# Altium PCB RiscPC_VRAM_16bit.PcbDoc (part 1 of 2)
Units mm, origin at the board's own origin, x right, y up, seen from the top; angles counter-clockwise.
Board outline 102.87 x 28 mm, 6 copper layers (Top_Power, Inner 1, Inner 2, Inner 3, Inner 4, Bottom_Ground), stack 1.211 mm thick; 29 components, 122 nets, 442 pads, 442 vias.
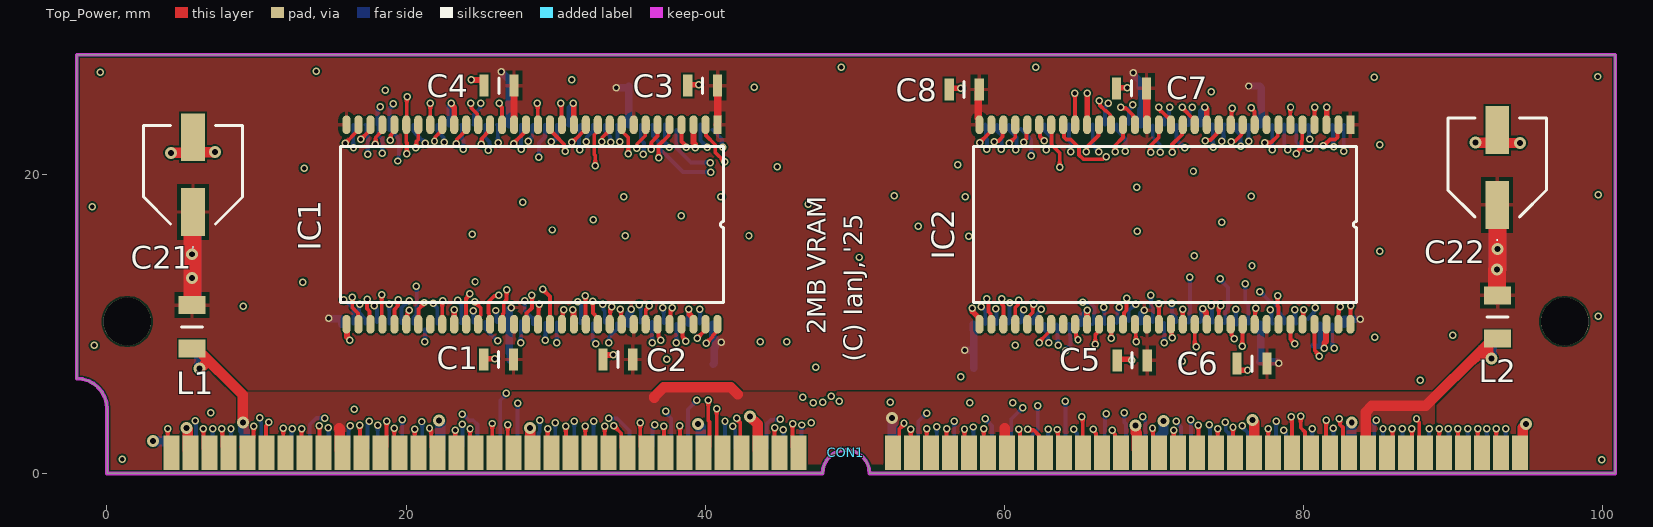
[diagram p0: Top_Power view]
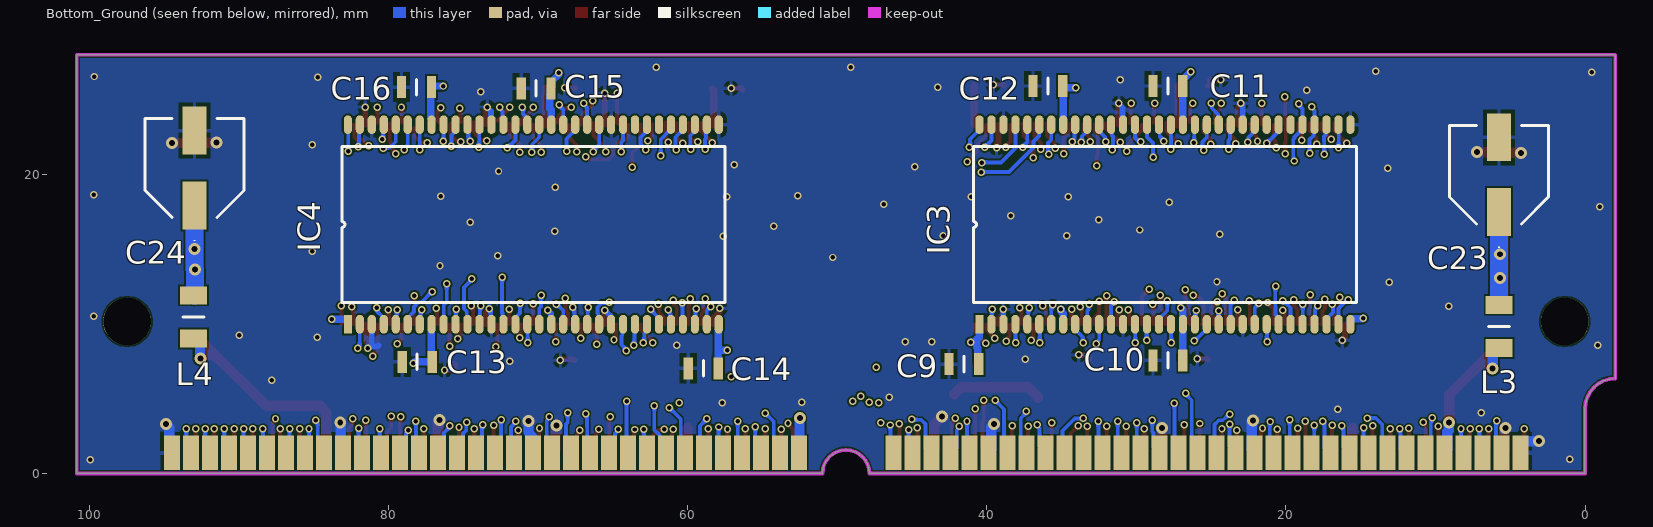
[diagram p1: Bottom_Ground view, seen from below]
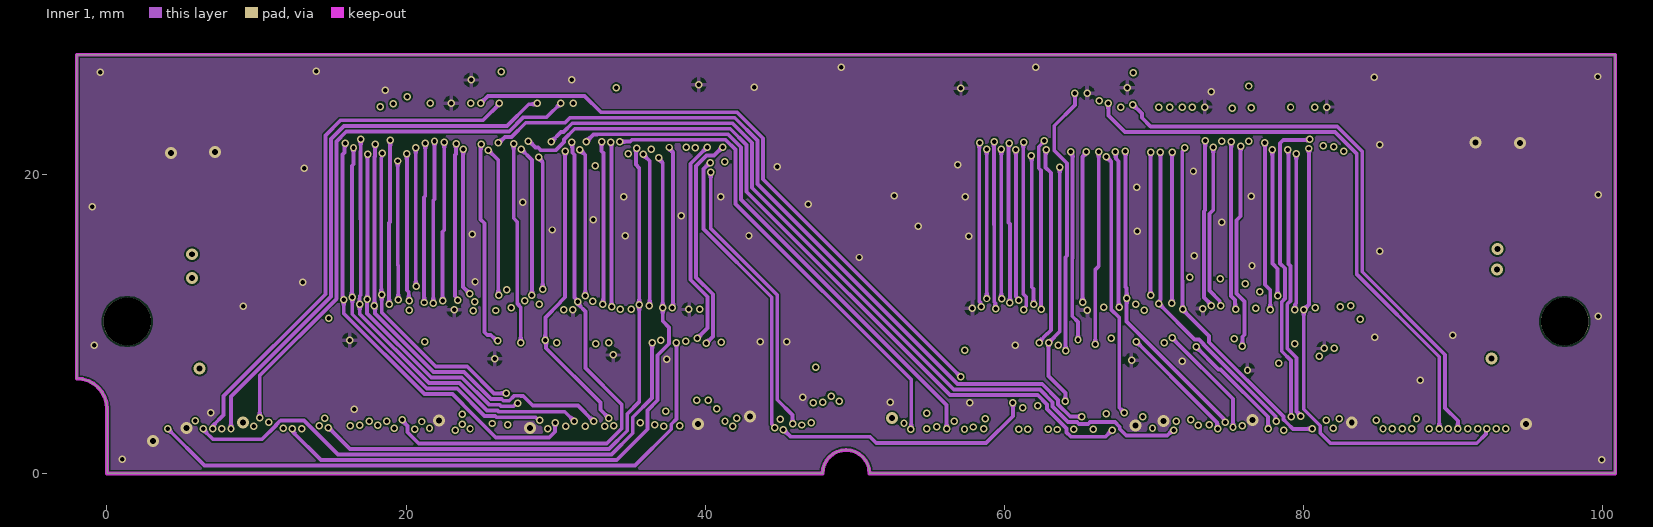
[diagram p2: Inner 1]
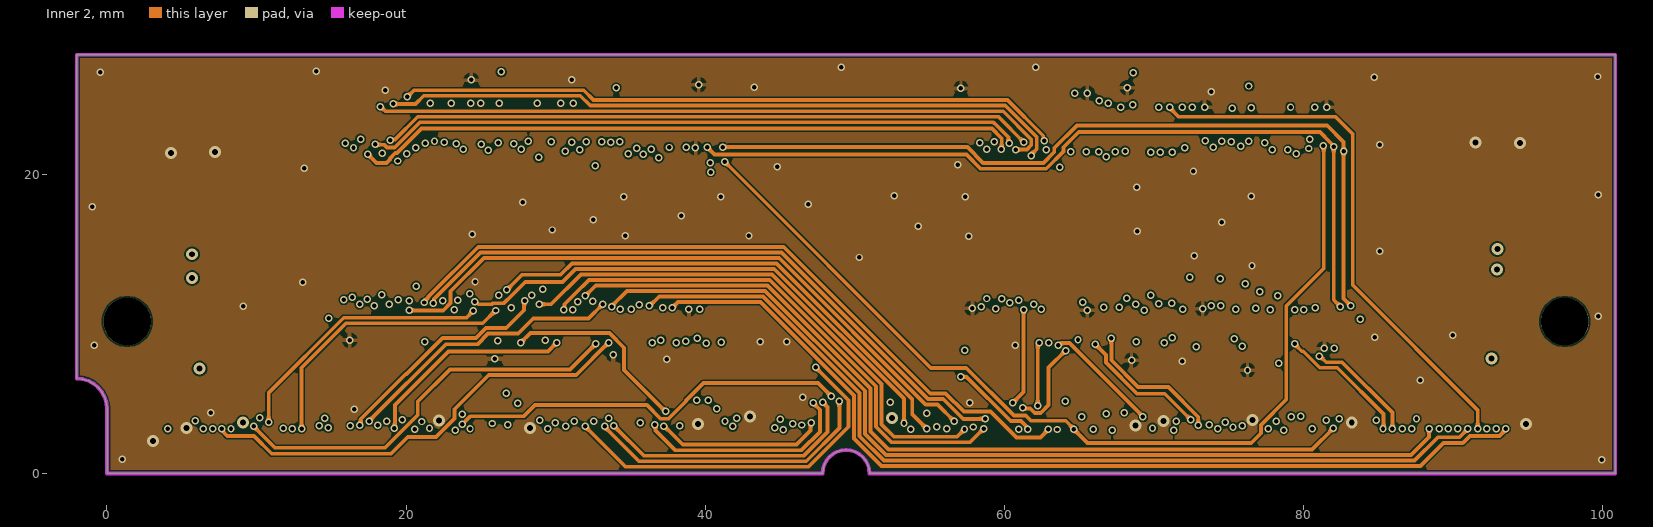
[diagram p3: Inner 2]
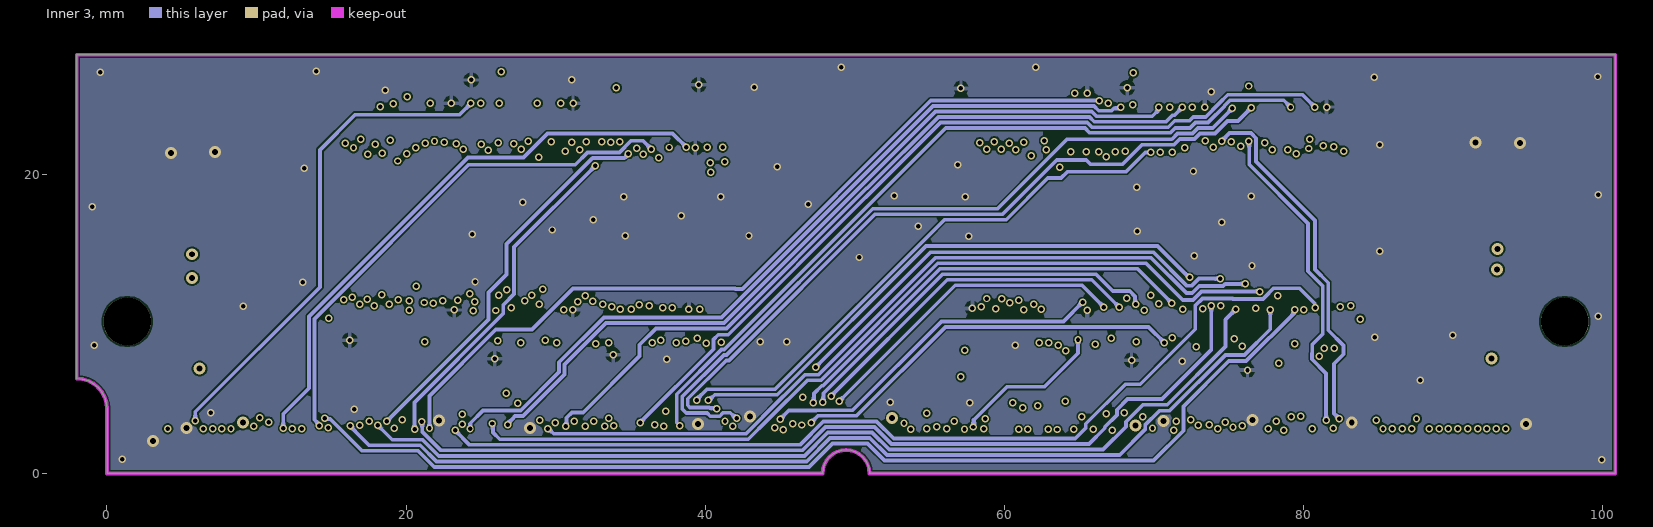
[diagram p4: Inner 3]
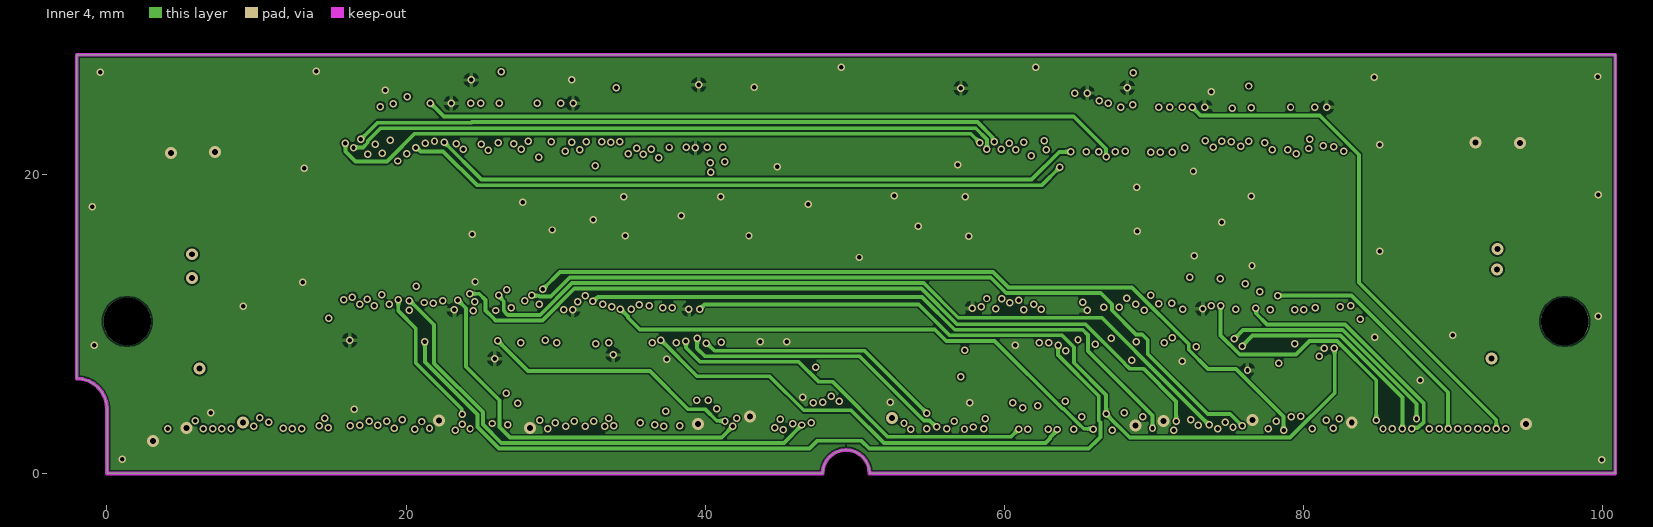
[diagram p5: Inner 4]
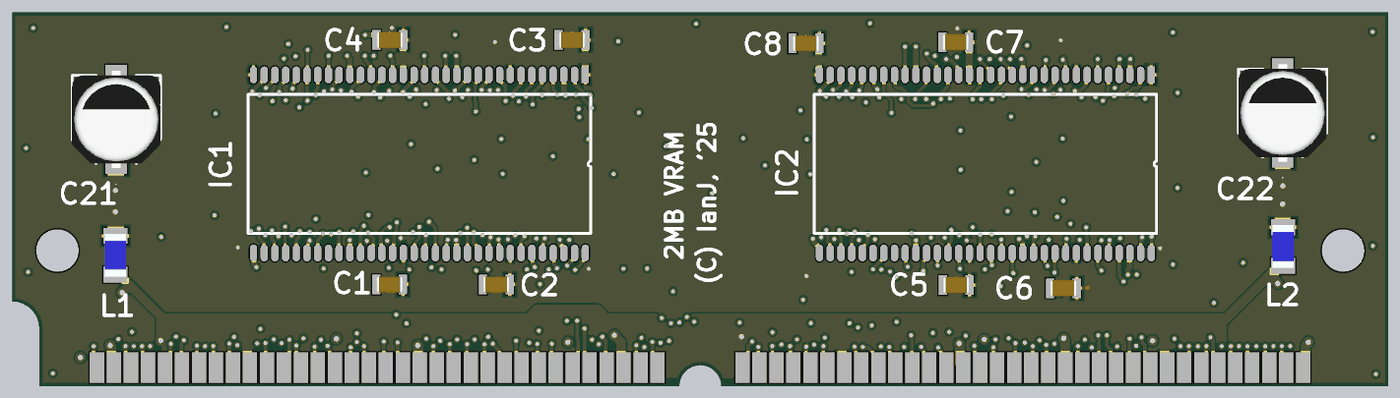
[diagram p7: 3D render of the assembled board from above, using the file's embedded part models]
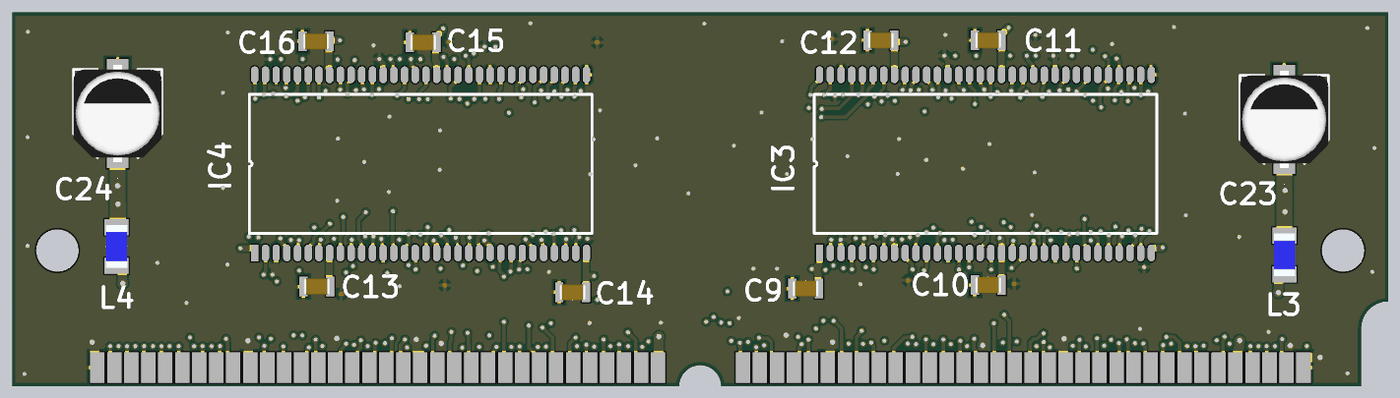
[diagram p8: 3D render of the assembled board from below, using the file's embedded part models]

## Layer stack, top to bottom
Top Solder: solder mask 0.0102, Solder Resist, Dk 3.5
Top_Power: signal copper 0.0356
Dielectric 3: prepreg 0.15, PP-006, Dk 4.1
Inner 1: signal copper 0.035
Dielectric 1: prepreg 0.15, PP-006, Dk 4.1
Inner 2: signal copper 0.035
Core: dielectric 0.4, FR-4, Dk 4.8
Inner 3: signal copper 0.035
Dielectric 2: prepreg 0.15, PP-006, Dk 4.1
Inner 4: signal copper 0.035
Dielectric 4: prepreg 0.15, PP-006, Dk 4.1
Bottom_Ground: signal copper 0.0356
Bottom Solder: solder mask 0.0102, Solder Resist, Dk 3.5

## Board outline
-2.023,28.003 -2.023,6.353 -1.627,6.314 -1.246,6.198 -0.896,6.01 -0.588,5.758 -0.335,5.45 -0.148,5.099 -0.032,4.719 0.007,4.323 0.007,0.003 47.847,0.003 47.877,0.309 47.966,0.603 48.111,0.875 48.307,1.113 48.544,1.308 48.816,1.453 49.11,1.542 49.417,1.573 49.723,1.542 50.017,1.453 50.289,1.308 50.527,1.113 50.722,0.875 50.867,0.603 50.957,0.309 50.987,0.003 100.847,0.003 100.847,28.003

## Design rules (kind name [scope] priority, off if disabled: settings)
Clearance [All] p1: gap=0.114 ignorepadtopadclearanceinfootprint=FALSE
HoleSize [All] p1: absolutevalues=TRUE maxlimit=3.81 minlimit=0.025 maxpercent=80.000 minpercent=20.000
MinimumSolderMaskSliver [All] p1: minsoldermaskwidth=0.02
PolygonConnect [All] p1: connectstyle=Relief reliefconductorwidth=0.254 reliefentries=4 polygonreliefangle="90 Angle" airgapwidth=0.254
RoutingVias [All] p1: holewidth=0.3 width=0.45 viastyle="Through Hole" minholewidth=0.3 minwidth=0.45 maxholewidth=0.711 maxwidth=1.27
SilkToSolderMaskClearance [IsPad] p1: minsilkscreentomaskgap=0.127 clearancetoexposedcopper=TRUE
SolderMaskExpansion [All] p1: expansion=0.102 istentingtop=FALSE
SupplyNets "Schematic Supply Nets_2" [InNet('VCC')] p1: voltage=0.000
SupplyNets "Schematic Supply Nets_1" [InNet('RAM_VCC')] p2: voltage=0.000
SupplyNets "Schematic Supply Nets" [InNet('GND')] p3: voltage=0.000
Width [All] p1: maxlimit=1.2 minlimit=0.254 preferedwidth=0.254
27 further rules are at their usual default settings.

## Components (designator, comment, footprint, x,y, rotation, side; value= is the part's Value field where it differs from the comment)
C1 "100nF" CAPC2012X145N 26.187,7.62 r180 top
C2 "100nF" CAPC2012X145N 34.163,7.62 r180 top
C3 "100nF" CAPC2012X145N 39.827,25.933 r180 top
C4 "100nF" CAPC2012X145N 26.213,25.933 r180 top
C5 "100nF" CAPC2012X145N 68.545,7.569 r180 top
C6 "100nF" CAPC2012X145N 76.556,7.341 r180 top
C7 "100nF" CAPC2012X145N 68.504,25.756 r180 top
C8 "100nF" CAPC2012X145N 57.312,25.679 r180 top
C9 "100nF" CAPC2012X145N 41.529,7.315 r0 bottom
C10 "100nF" CAPC2012X145N 27.889,7.569 r0 bottom
C11 "100nF" CAPC2012X145N 27.889,25.908 r0 bottom
C12 "100nF" CAPC2012X145N 35.916,25.908 r0 bottom
C13 "100nF" CAPC2012X145N 78.08,7.468 r0 bottom
C14 "100nF" CAPC2012X145N 58.953,7.036 r0 bottom
C15 "100nF" CAPC2012X145N 70.129,25.756 r0 bottom
C16 "100nF" CAPC2012X145N 78.13,25.832 r0 bottom
C21 "EEE-HA1C470AP" EEE1AA101SP 5.756,19.98 r90 top
C22 "EEE-HA1C470AP" EEE1AA101SP 92.951,20.462 r90 top
C23 "EEE-HA1C470AP" EEE1AA101SP 5.756,19.98 r90 bottom
C24 "EEE-HA1C470AP" EEE1AA101SP 92.964,20.422 r90 bottom
CON1 "RiscPC_VRAM_Edge" RiscPC_VRAM_Edge 3.782,0.25 r0 top locked
IC1 "KM4216C258G-50" KM4216C258G-50_SSOP64 40.818,23.317 r270 top locked
IC2 "KM4216C258G-50" KM4216C258G-50_SSOP64 83.132,23.317 r270 top locked
IC3 "KM4216C258G-50" KM4216C258G-50_SSOP64 40.487,9.982 r90 bottom locked
IC4 "KM4216C258G-50" KM4216C258G-50_SSOP64 82.715,9.982 r90 bottom locked
L1 "74279215" INDC3216X130N 5.69,9.804 r90 top
L2 "74279215" INDC3216X130N 92.976,10.462 r90 top
L3 "74279215" INDC3216X130N 5.74,9.83 r90 bottom
L4 "74279215" INDC3216X130N 93.04,10.465 r90 bottom

## Footprints (in the part's own frame and the unit in brackets; to place one, negate y for a bottom-side part, rotate by r counter-clockwise, add the part's x,y. Pads: shape width x height; smd on the part's side, far side on the other; paste and mask are expansions set on the pad)
CAPC2012X145N [mm]
  rect 0.62x1.47 smd: 1(-1,0) 2(1,0)
  silkscreen extent 0,-0.53 0,0.53, body extent -1,-0.63 1,0.63, height 1.45
EEE1AA101SP [mm]
  rect 3.2x1.6 smd: 1(-2.5,0) 2(2.5,0)
  silkscreen extent -4.88,-3.3 3.3,3.3, body extent 0,0 0,0
INDC3216X130N [mm]
  rect 1.2x1.8 smd: 1(-1.45,0) 2(1.45,0)
  silkscreen extent 0,-0.7 0,0.7, body extent -1.6,-0.8 1.6,0.8, height 1.3
KM4216C258G-50_SSOP64 [mm]
  rect 1.25x0.55 smd: 1(0,0)
  oval 1.25x0.55 smd: 2(0,-0.8) 3(0,-1.6) 4(0,-2.4) 5(0,-3.2) 6(0,-4) 7(0,-4.8) 8(0,-5.6) 9(0,-6.4) 10(0,-7.2) 11(0,-8) 12(0,-8.8) 13(0,-9.6) 14(0,-10.4) 15(0,-11.2) 16(0,-12) 17(0,-12.8) 18(0,-13.6) 19(0,-14.4) 20(0,-15.2) 21(0,-16) 22(0,-16.8) 23(0,-17.6) 24(0,-18.4) 25(0,-19.2) 26(0,-20) 27(0,-20.8) 28(0,-21.6) 29(0,-22.4) 30(0,-23.2) 31(0,-24) 32(0,-24.8) 33(13.34,-24.8) 34(13.34,-24) 35(13.34,-23.2) 36(13.34,-22.4) 37(13.34,-21.6) 38(13.34,-20.8) 39(13.34,-20) 40(13.34,-19.2) 41(13.34,-18.4) 42(13.34,-17.6) 43(13.34,-16.8) 44(13.34,-16) 45(13.34,-15.2) 46(13.34,-14.4) 47(13.34,-13.6) 48(13.34,-12.8) 49(13.34,-12) 50(13.34,-11.2) 51(13.34,-10.4) 52(13.34,-9.6) 53(13.34,-8.8) 54(13.34,-8) 55(13.34,-7.2) 56(13.34,-6.4) 57(13.34,-5.6) 58(13.34,-4.8) 59(13.34,-4) 60(13.34,-3.2) 61(13.34,-2.4) 62(13.34,-1.6) 63(13.34,-0.8) 64(13.34,0)
  silkscreen extent 1.46,-25.2 11.88,0.4, body extent 0.33,-25.4 13.18,0.53, height 2.4
RiscPC_VRAM_Edge [mm]
  rect 1.07x2.29 smd: A1(0.533,1.143) A2(1.803,1.143) A3(3.073,1.143) A4(4.343,1.143) A5(5.613,1.143) A6(6.883,1.143) A7(8.153,1.143) A8(9.423,1.143) A9(10.693,1.143) A10(11.963,1.143) A11(13.233,1.143) A12(14.503,1.143) A13(15.773,1.143) A14(17.043,1.143) A15(18.313,1.143) A16(19.583,1.143) A17(20.853,1.143) A18(22.123,1.143) A19(23.393,1.143) A20(24.663,1.143) A21(25.933,1.143) A22(27.203,1.143) A23(28.473,1.143) A24(29.743,1.143) A25(31.013,1.143) A26(32.283,1.143) A27(33.553,1.143) A28(34.823,1.143) A29(36.093,1.143) A30(37.363,1.143) A31(38.633,1.143) A32(39.903,1.143) A33(41.173,1.143) A34(42.443,1.143) A35(48.785,1.143) A36(50.055,1.143) A37(51.325,1.143) A38(52.595,1.143) A39(53.865,1.143) A40(55.135,1.143) A41(56.405,1.143) A42(57.675,1.143) A43(58.945,1.143) A44(60.215,1.143) A45(61.485,1.143) A46(62.755,1.143) A47(64.025,1.143) A48(65.295,1.143) A49(66.565,1.143) A50(67.835,1.143) A51(69.105,1.143) A52(70.375,1.143) A53(71.645,1.143) A54(72.915,1.143) A55(74.185,1.143) A56(75.455,1.143) A57(76.725,1.143) A58(77.995,1.143) A59(79.265,1.143) A60(80.535,1.143) A61(81.805,1.143) A62(83.075,1.143) A63(84.345,1.143) A64(85.615,1.143) A65(86.885,1.143) A66(88.155,1.143) A67(89.425,1.143) A68(90.695,1.143)
  rect 1.07x2.29 smd far side: B1(0.533,1.143) B2(1.803,1.143) B3(3.073,1.143) B4(4.343,1.143) B5(5.613,1.143) B6(6.883,1.143) B7(8.153,1.143) B8(9.423,1.143) B9(10.693,1.143) B10(11.963,1.143) B11(13.233,1.143) B12(14.503,1.143) B13(15.773,1.143) B14(17.043,1.143) B15(18.313,1.143) B16(19.583,1.143) B17(20.853,1.143) B18(22.123,1.143) B19(23.393,1.143) B20(24.663,1.143) B21(25.933,1.143) B22(27.203,1.143) B23(28.473,1.143) B24(29.743,1.143) B25(31.013,1.143) B26(32.283,1.143) B27(33.553,1.143) B28(34.823,1.143) B29(36.093,1.143) B30(37.363,1.143) B31(38.633,1.143) B32(39.903,1.143) B33(41.173,1.143) B34(42.443,1.143) B35(48.785,1.143) B36(50.055,1.143) B37(51.325,1.143) B38(52.595,1.143) B39(53.865,1.143) B40(55.135,1.143) B41(56.405,1.143) B42(57.675,1.143) B43(58.945,1.143) B44(60.215,1.143) B45(61.485,1.143) B46(62.755,1.143) B47(64.025,1.143) B48(65.295,1.143) B49(66.565,1.143) B50(67.835,1.143) B51(69.105,1.143) B52(70.375,1.143) B53(71.645,1.143) B54(72.915,1.143) B55(74.185,1.143) B56(75.455,1.143) B57(76.725,1.143) B58(77.995,1.143) B59(79.265,1.143) B60(80.535,1.143) B61(81.805,1.143) B62(83.075,1.143) B63(84.345,1.143) B64(85.615,1.143) B65(86.885,1.143) B66(88.155,1.143) B67(89.425,1.143) B68(90.695,1.143)

## Part data
C1 C2 C3 C4 C5 C6 C7 C8 C9 C10 C11 C12 C13 C14 C15 C16: library part C2012X7R1H104K125AM, "Capacitor", Manufacturer_Name=TDK, Mouser Part Number=810-C2012X7R1H104KT5, Arrow Part Number=C2012X7R1H104K125AM, Arrow Price/Stock=https://www.arrow.com/en/products/c2012x7r1h104k125am/tdk, Datasheet Link=https://product.tdk.com/info/en/catalog/datasheets/mlcc_commercial_midvoltage_en.pdf, Height=1.45mm, Manufacturer_Part_Number=C2012X7R1H104K125AM, Mouser Price/Stock=https://www.mouser.com/Search/Refine.aspx?Keyword=810-C2012X7R1H104KT5
C21 C22 C23 C24: "Capacitor Polarised", Manufacturer_Name=Panasonic, Mouser Part Number=667-EEE-HA1C470AP, Arrow Part Number=EEE-HA1C470AP, Arrow Price/Stock=https://www.arrow.com/en/products/eeeha1c470ap/panasonic?utm_currency=USD&region=europe, Datasheet Link=http://industrial.panasonic.com/cdbs/www-data/pdf/RDE0000/ABA0000C1148.pdf, Height=7.8mm, Manufacturer_Part_Number=EEE-HA1C470AP, Mouser Price/Stock=https://www.mouser.co.uk/ProductDetail/Panasonic/EEE-HA1C470AP?qs=d1CqaRUMZD%2FL5qU1hDRerg%3D%3D
L1 L2 L3 L4: "Inductor", Manufacturer_Name="Wurth Elektronik", Mouser Part Number=710-74279215, Datasheet Link=http://componentsearchengine.com/Datasheets/1/74279215.pdf, Height=1.3mm, Manufacturer_Part_Number=74279215, Mouser Price/Stock=https://www.mouser.co.uk/ProductDetail/Wurth-Elektronik/74279215?qs=5twSNpOB8IC%252BebnV0jQtuw%3D%3D

## Free pads (board coordinates)
  round 3.18 hole 3.18 unplated: 1(1.357,10.163) 1(97.467,10.163)

## Via types
v1: diameter 0.5, hole 0.3, Top_Power to Bottom_Ground, tented both sides, 419 vias
v2: diameter 0.8, hole 0.4, Top_Power to Bottom_Ground, tented both sides, 23 vias

## Nets (pads, with @x,y where several pads share a name; then routed paths per layer and width w, separated by ;. In a path a pad name is that pad's centre, name@x,y a point inside that pad or via, vN(x,y) a via of type N, cw(c..) or ccw(c..) an arc to the next point about the centre after c; other vN are vias at no path point)
Cas0*: CON1.B40 IC1.24 IC3.24 | length 59.2
  Top_Power w0.254: v1(21.899,22.229) 21.947,22.276 21.947,22.496 22.321,22.871 22.321,23.299 IC1.24@22.393,23.371
  Inner 1 w0.254: v1(21.819,11.397) 21.819,18.263 21.899,18.343 v1(21.899,22.229)
  Inner 2 w0.254: v1(21.819,11.397) 21.866,11.444 21.866,11.673 24.976,14.783 45.098,14.783 54.89,4.991 55.918,4.991 57.256,3.653 58.725,3.653 v1(58.729,3.649)
  Bottom_Ground w0.254: v1(21.819,11.397) 21.819,11.33 22.087,11.061 22.087,10.044 IC3.24@22.098,10.033 ; v1(58.729,3.649) 58.729,3.639 59.171,3.198 59.171,1.683 CON1.B40@58.944,1.457
Cas1*: CON1.B43 IC1.39 IC3.39 | length 64.4
  Top_Power w0.254: IC1.39@20.818,9.977 20.826,9.986 20.826,10.987 21.206,11.367 v1(21.206,11.433)
  Inner 1 w0.254: v1(21.206,11.433) 21.205,18.462 21.285,18.542 v1(21.285,22.073)
  Inner 2 w0.254: v1(21.206,11.433) 21.206,11.5 21.497,11.792 21.497,11.826 24.823,15.151 45.25,15.151 55.042,5.36 56.071,5.36 57.29,4.14 59.073,4.14 60.803,2.411 62.413,2.411 62.922,2.92 v1(62.922,2.974)
  Bottom_Ground w0.254: IC3.39@20.487,23.322 20.487,22.892 20.635,22.744 20.635,22.722 v1(21.285,22.073) ; CON1.B43@62.703,1.38 62.922,1.599 v1(62.922,2.974)
Cas2*: CON1.B41 IC2.24 IC4.24 | length 31.8
  Top_Power w0.254: IC2.24@64.636,23.373 64.719,23.457 v1(64.719,25.432)
  Inner 1 w0.254: v1(64.089,8.212) 64.093,8.215 64.093,14.462 64.194,14.563 64.194,20.743 63.756,21.182 63.747,21.182 63.339,21.59 63.339,23.251 64.719,24.631 v1(64.719,25.432)
  Inner 2 w0.254: v1(61.214,4.394) 61.261,4.347 61.735,4.347 62.026,4.055 62.434,4.055 62.96,4.581 62.96,7.082 v1(64.089,8.212)
  Bottom_Ground w0.254: CON1.B41@60.163,1.482 60.461,1.78 60.461,3.642 v1(61.214,4.394) ; v1(64.089,8.212) 64.089,8.278 64.423,8.612 64.423,9.191 64.372,9.243 64.372,9.956 IC4.24@64.315,10.013
Cas3*: CON1.B42 IC2.39 IC4.39 | length 24.6
  Top_Power w0.254: v1(62.332,8.754) 62.332,8.811 63.132,9.612 IC2.39@63.132,9.977
  Inner 1 w0.254: v1(62.332,8.754) 62.332,8.814 62.859,9.342 62.876,9.342 63.11,9.576 63.11,20.113 62.755,20.469 62.755,21.607 v1(62.789,21.641)
  Inner 2 w0.254: v1(62.23,4.547) 62.23,8.586 62.332,8.688 v1(62.332,8.754)
  Bottom_Ground w0.254: CON1.B42@61.459,1.431 61.865,1.837 61.865,2.548 61.951,2.634 61.951,2.638 62.23,2.917 v1(62.23,4.547) ; IC4.39@62.687,23.335 62.687,22.926 63.142,22.471 63.142,22.036 62.789,21.683 v1(62.789,21.641)
Dsf: CON1.B39 IC1.41 IC2.41 IC3.41 IC4.41 | length 85.5
  Top_Power w0.254: IC1.41@22.418,9.977 22.418,11.53 v1(22.436,11.549) ; IC2.41@64.732,9.977 64.789,9.921 64.789,9.141 64.922,9.007 v1(64.922,8.941)
  Inner 1 w0.254: v1(22.436,11.549) 22.436,16.168 22.555,16.287 v1(22.555,22.149) ; v1(64.448,21.505) 64.448,21.439 64.563,21.324 64.563,14.411 64.533,14.381 64.533,10.515 64.922,10.126 v1(64.922,8.941)
  Inner 4 w0.254: v1(22.555,22.149) 25.044,19.66 61.824,19.66 63.669,21.505 v1(64.448,21.505)
  Inner 3 w0.254: 57.929,3.595 v1(57.929,3.11) 57.976,3.157 57.976,3.595 60.177,5.796 62.675,5.796 64.922,8.044 v1(64.922,8.941)
  Bottom_Ground w0.254: IC3.41@22.087,23.322 22.087,22.896 22.508,22.475 22.508,22.196 v1(22.555,22.149) ; CON1.B39@57.623,1.482 57.929,1.788 v1(57.929,3.11) ; IC4.41@64.315,23.333 64.315,22.263 64.442,22.136 64.442,21.512 v1(64.448,21.505)
Dt0*: CON1.B45 IC1.2 IC2.2 | length 71.5
  Top_Power w0.254: IC1.2@40.018,23.317 40.06,23.275 40.06,22.59 40.669,21.98 40.669,21.471 v1(41.3,20.84) ; v1(81.334,21.898) 81.763,22.327 82.127,22.327 82.276,22.475 82.276,23.261 IC2.2@82.332,23.317
  Inner 2 w0.254: v1(41.3,20.84) 55.077,7.063 57.453,7.063 60.642,3.873 61.433,3.873 61.776,3.531 64.101,3.531 64.652,2.98 v1(64.652,2.947) 65.556,2.043 76.505,2.043 77.157,2.694 77.157,3.25 78.85,4.944 78.85,11.203 81.352,13.705 81.352,21.881 v1(81.334,21.898)
  Bottom_Ground w0.254: v1(64.652,2.947) 64.652,2.88 64.859,2.673 64.859,2.244 CON1.B45@65.381,1.722
Dt1*: CON1.B46 IC3.2 IC4.2 | length 57.2
  Inner 4 w0.254: v1(39.624,10.971) 39.956,11.303 54.28,11.303 56.337,9.246 63.856,9.246 64.655,8.446 64.655,7.404 66.802,5.258 v1(66.802,3.988) 68.379,2.411 79.103,2.411 82.084,5.392 82.084,8.319 v1(82.042,8.361)
  Bottom_Ground w0.254: v1(39.624,10.971) 39.656,10.94 39.656,10.065 IC3.2@39.631,10.04 ; CON1.B46@66.539,1.406 66.729,1.596 66.708,1.617 66.708,3.1 66.729,3.121 66.729,3.848 66.802,3.921 v1(66.802,3.988) ; IC4.2@81.915,9.982 81.915,8.554 82.042,8.427 v1(82.042,8.361)
GND: C1.2 C2.2 C3.2 C4.2 C5.2 C6.2 C7.2 C8.2 C9.2 C10.2 C11.2 C12.2 C13.2 C14.2 C15.2 C16.2 C21.2 C22.2 C23.2 C24.2 CON1.A2 CON1.A20 CON1.A32 CON1.A48 CON1.A54 CON1.A68 CON1.B1 CON1.B15 CON1.B29 CON1.B49 CON1.B59 CON1.B68 IC1.3 IC1.13 IC1.23 IC1.33 IC1.42 IC1.52 IC1.62 IC2.3 IC2.13 IC2.23 IC2.33 IC2.42 IC2.52 IC2.62 IC3.3 IC3.13 IC3.23 IC3.33 IC3.42 IC3.52 IC3.62 IC4.3 IC4.13 IC4.23 IC4.33 IC4.42 IC4.52 IC4.62 | length 64.8
  Top_Power w0.381: IC1.33@16.018,9.977 16.05,9.945 16.05,9.128 16.231,8.948 v1(16.231,8.915) ; v1@23.012,24.71 23.012,24.677 23.217,24.473 23.217,23.318 IC1.23@23.218,23.317 ; v1(23.216,10.939) 23.217,10.938 23.217,9.978 IC1.42@23.218,9.977 ; v1(24.359,26.314) 25.093,26.314 25.093,26.053 C4.2@25.213,25.933 ; C1.2@25.187,7.62 25.238,7.671 v1(25.933,7.671) ; v1@31.166,24.74 31.166,24.707 31.218,24.656 IC1.13@31.218,23.317 ; C2.2@33.163,7.62 33.163,7.805 33.282,7.925 v1(33.858,7.925) ; C3.2@38.827,25.933 38.891,25.998 v1(39.573,25.998) ; v1(38.913,10.971) 38.936,10.949 38.936,10.655 39.218,10.373 IC1.62@39.218,9.977 ; IC1.3@39.218,23.317 39.218,22.122 39.322,22.018 39.322,21.791 v1(39.345,21.768) ; C8.2@56.312,25.679 56.384,25.752 v1(57.099,25.752) ; v1(57.844,11.047) 57.867,11.024 57.867,10.838 58.332,10.373 IC2.33@58.332,9.977 ; IC2.23@65.532,23.317 v1(65.532,25.434) ; C7.2@67.504,25.756 67.547,25.799 v1(68.217,25.799) ; C5.2@67.545,7.569 67.588,7.569 67.665,7.645 68.395,7.645 68.472,7.569 v1(68.504,7.569) ; CON1.A48@68.859,1.611 CON1.A48@69.077,1.393 ; v1(73.254,11.024) 73.254,10.991 73.5,10.745 73.5,10.01 IC2.52@73.532,9.977 ; v1@73.406,24.511 73.406,24.479 73.532,24.353 IC2.13@73.532,23.37 ; C6.2@75.556,7.341 75.556,7.033 75.675,6.913 v1(76.255,6.913) ; v1(81.382,8.361) 81.382,8.712 81.5,8.83 81.5,9.945 IC2.62@81.532,9.977 ; IC2.3@81.532,23.317 81.546,23.331 81.546,24.523 v1@81.559,24.536 ; CON1.A68@94.477,1.393 CON1.A68@94.495,1.411
  Top_Power w0.4: v1(31.157,10.95) 31.157,10.946 31.189,10.914 31.189,10.028 IC1.52@31.218,9.998 ; IC2.42@65.534,9.998 65.535,10 65.535,10.915 v1(65.538,10.918)
  Top_Power w0.5: C21.2@5.756,21.438 C21.2@5.807,21.488 ; C22.2@92.784,22.123 C22.2@92.86,22.047 ; C22.2@93.292,22.257 C22.2@93.451,22.098
  Top_Power w0.7: v2(4.293,21.438) C21.2@5.756,21.438 ; v2(5.309,3.052) 5.309,3.025 5.4,2.934 5.4,1.578 CON1.A2@5.585,1.393 ; C21.2@5.807,21.488 v2(7.214,21.488) ; v2(28.296,3.052) 28.315,3.033 28.315,1.263 CON1.A20@28.445,1.393 ; v2(42.989,3.823) 42.989,3.796 43.5,3.285 43.5,1.578 CON1.A32@43.685,1.393 ; v2(68.771,3.2) 68.79,3.181 68.79,2.747 68.859,2.677 CON1.A48@68.859,1.611 ; v2(76.581,3.581) 76.581,3.554 76.697,3.438 CON1.A54@76.697,1.393 ; v2(91.491,22.123) C22.2@92.784,22.123 ; C22.2@93.451,22.098 v2(94.463,22.098) ; CON1.A68@94.495,1.411 94.47,1.437 94.662,1.629 94.662,3.068 94.869,3.275 v2(94.869,3.302)
  Bottom_Ground w0.254: IC4.13@73.101,10.109 73.172,10.18 73.172,10.875 73.254,10.957 v1(73.254,11.024)
  Bottom_Ground w0.381: IC3.42@22.887,23.322 22.887,24.552 23.012,24.677 v1@23.012,24.71 ; IC3.52@30.887,23.322 30.92,23.355 30.92,24.461 31.166,24.707 v1@31.166,24.74 ; IC3.3@38.887,9.982 38.9,9.995 38.9,10.959 v1(38.913,10.971) ; IC4.23@65.115,9.982 65.147,10.015 65.147,10.527 v1@65.516,10.895 ; IC4.52@73.115,23.322 73.147,23.355 73.147,24.22 73.406,24.479 v1@73.406,24.511 ; 80.67,8.56 80.724,8.506 81.204,8.506 81.349,8.361 v1(81.382,8.361) ; 81.115,8.766 IC4.3@81.115,9.982 ; CON1.B68@94.47,1.4 CON1.B68@94.477,1.393
  Bottom_Ground w0.65: CON1.B49@70.358,2.464 70.637,2.743 v2(70.637,3.505)
  Bottom_Ground w0.7: v2(3.073,2.159) 4.13,2.159 4.315,1.974 CON1.B1@4.315,1.393 ; CON1.B15@22.095,1.393 22.28,1.578 22.28,3.456 22.207,3.529 v2(22.207,3.556) ; v2(39.522,3.302) 39.522,3.275 39.69,3.107 39.69,1.578 CON1.B29@39.875,1.393 ; CON1.B59@83.047,1.393 83.206,1.552 83.206,3.384 v2(83.225,3.404) ; CON1.B68@94.47,1.4 94.662,1.592 94.662,3.068 94.869,3.275 v2(94.869,3.302)
  other v1: 99.924,0.914 1.016,0.965 6.934,4.064 16.535,4.293 57.683,4.724 52.359,4.762 46.533,5.105 87.808,6.248 71.882,7.493 37.44,7.645 -0.838,8.56 60.731,8.56 43.672,8.797 45.441,8.814 84.76,9.119 89.992,9.246 99.695,10.516 9.119,11.176 13.106,12.802 24.608,12.823 76.556,13.894 50.292,14.443 72.695,14.554 85.09,14.859 57.633,15.875 34.646,15.9 42.926,15.9 24.409,16.002 68.885,16.205 29.769,16.281 54.254,16.535 74.524,16.789 32.517,16.953 38.405,17.221 -0.991,17.831 46.888,18.009 27.788,18.136 41.035,18.498 57.379,18.491 34.544,18.517 76.505,18.542 52.629,18.566 99.695,18.644 68.859,19.152 72.644,20.193 13.183,20.422 44.831,20.498 56.897,20.654 85.09,21.971 73.406,24.5 81.559,24.5 23.012,24.75 31.166,24.75 73.838,25.527 18.618,25.629 43.282,25.832 31.09,26.314 84.734,26.492 99.67,26.543 -0.457,26.822 13.995,26.899 49.098,27.153 62.103,27.178
Qsf: CON1.B38 IC1.38 | length 46
  Top_Power w0.254: IC1.38@20.018,9.977 20.074,10.034 20.074,10.705 20.212,10.843 v1(20.212,10.909)
  Inner 2 w0.254: v1(20.212,10.909) 20.216,10.905 22.488,10.905 22.978,11.396 22.978,12.183 25.209,14.414 44.945,14.414 54.737,4.623 55.521,4.623 v1(56.644,3.5)
  Bottom_Ground w0.254: CON1.B38@56.379,1.431 56.644,1.696 v1@56.644,3.467
Ra0: CON1.B17 IC1.37 IC2.37 IC3.37 IC4.37 | length 87.3
  Top_Power w0.254: IC1.37@19.218,9.977 19.218,10.963 19.435,11.18 19.435,11.561 v1(19.482,11.608) ; IC2.37@61.532,9.977 61.532,10.407 61.904,10.779 61.904,11.277 v1(61.951,11.324)
  Inner 1 w0.254: v1(19.439,20.894) 19.439,13.932 19.482,13.889 v1(19.482,11.608) ; v1(61.791,21.26) 61.828,21.223 61.828,12.459 61.951,12.336 v1(61.951,11.324)
  Inner 4 w0.254: v1(19.482,11.608) 19.482,10.871 20.65,9.703 20.65,7.391 23.722,4.32 23.722,3.989 v1(23.749,3.962)
  Inner 2 w0.254: v1(19.156,24.71) 20.627,24.71 21.178,25.26 31.647,25.26 32.308,24.6 60.064,24.6 62.159,22.505 62.159,21.694 61.791,21.326 v1(61.791,21.26)
  Bottom_Ground w0.254: v1(19.156,24.71) 19.156,24.643 18.887,24.374 18.887,22.972 18.945,22.972 19.425,22.492 19.425,22.434 19.515,22.345 19.515,21.166 19.486,21.138 19.486,20.941 v1(19.439,20.894) ; v1(23.749,3.962) 23.816,3.962 24.222,3.556 24.485,3.556 24.765,3.277 24.765,1.517 CON1.B17@24.629,1.38 ; IC4.37@61.112,23.031 61.791,22.352 v1(61.791,21.26)
Ra1: CON1.B18 IC1.36 IC2.36 IC3.36 IC4.36 | length 90.6
  Top_Power w0.254: v1(18.375,11.96) 18.372,11.957 18.372,10.023 IC1.36@18.418,9.977 ; IC2.36@60.732,9.977 60.732,11.092 60.791,11.151 60.791,11.159 60.921,11.289 60.921,11.527 v1(60.968,11.574)
  Inner 1 w0.254: v1(18.375,11.96) 18.343,11.992 18.343,21.117 18.37,21.144 18.37,21.372 v1(18.417,21.419) ; v1(18.375,11.96) 18.372,11.957 18.372,10.767 21.989,7.15 24.092,7.15 25.883,5.359 v1(26.695,5.359) ; v1(60.771,21.641) 60.771,11.837 60.968,11.64 v1(60.968,11.574)
  Inner 2 w0.254: v1(18.288,24.536) 18.606,24.218 59.925,24.218 61.791,22.352 61.791,21.945 61.503,21.658 60.788,21.658 v1(60.771,21.641)
  Bottom_Ground w0.254: v1(18.288,24.536) 18.288,24.475 18.087,24.274 IC3.36@18.087,23.322 18.143,23.267 18.143,22.608 18.417,22.333 v1(18.417,21.419) ; CON1.B18@25.899,1.431 26.301,1.834 26.301,4.899 26.695,5.293 v1(26.695,5.359) ; IC4.36@60.315,23.319 60.315,22.972 60.808,22.479 60.808,21.678 v1(60.771,21.641)
Ra2: CON1.B19 IC1.35 IC2.35 IC3.35 IC4.35 | length 88.8
  Top_Power w0.254: v1(17.399,11.659) 17.389,11.649 17.389,11.023 17.561,10.851 17.561,10.058 IC1.35@17.629,9.989 ; v1(59.813,11.681) 59.86,11.633 59.86,11.288 59.882,11.266 59.882,11.256 59.899,11.239 59.899,11.212 59.923,11.188 59.923,11.18 59.932,11.171 IC2.35@59.932,9.977
  Inner 1 w0.254: v1(17.434,21.357) 17.417,21.339 17.417,11.676 17.389,11.649 17.389,10.708 21.684,6.413 23.724,6.413 25.534,4.604 26.235,4.604 26.339,4.5 27.183,4.5 27.391,4.708 v1(27.457,4.708) ; v1(59.789,21.666) 59.795,21.66 59.795,11.699 v1(59.813,11.681)
  Inner 2 w0.254: v1(17.434,21.357) 18.027,20.764 18.695,20.764 18.916,20.985 18.916,21.065 19.279,21.429 19.397,21.429 21.032,23.063 59.166,23.063 59.826,22.403 59.826,21.703 v1(59.789,21.666)
  Bottom_Ground w0.254: IC3.35@17.287,23.322 17.344,23.266 17.344,22.642 17.447,22.539 17.447,22.238 17.434,22.225 17.434,22.096 v1(17.434,21.357) ; CON1.B19@27.22,1.406 27.457,1.644 v1(27.457,4.708) ; IC4.35@59.515,23.307 59.515,22.892 59.826,22.581 59.826,21.703 v1(59.789,21.666)
Ra3: CON1.B20 IC1.34 IC2.34 IC3.34 IC4.34 | length 90.1
  Top_Power w0.254: v1(16.416,11.796) 16.406,11.785 16.406,11.099 16.788,10.718 16.788,10.007 IC1.34@16.818,9.977 ; v1(58.826,11.701) 58.873,11.654 58.873,11.421 58.941,11.354 58.941,10.817 59.076,10.683 59.076,10.034 IC2.34@59.132,9.977
  Inner 1 w0.254: v1(16.484,21.785) 16.484,20.679 16.377,20.572 16.377,11.835 v1(16.416,11.796) 16.406,11.785 16.406,10.649 21.379,5.677 23.419,5.677 25.248,3.848 25.949,3.848 26.034,3.763 28.657,3.763 28.864,3.556 v1(28.931,3.556) ; v1(58.806,21.692) 58.816,21.681 58.816,11.711 v1(58.826,11.701)
  Inner 4 w0.254: v1(16.484,21.785) 16.5,21.8 17.115,21.8 17.434,22.12 17.434,22.225 18.298,23.089 58.081,23.089 58.843,22.327 58.843,21.729 v1(58.806,21.692)
  Bottom_Ground w0.254: v1(16.484,21.785) 16.464,21.804 16.464,23.299 IC3.34@16.487,23.322 ; CON1.B20@28.464,1.355 28.853,1.744 28.853,2.703 28.937,2.787 28.937,3.55 v1(28.931,3.556) ; IC4.34@58.725,23.335 58.772,23.288 58.772,22.398 58.843,22.327 58.843,21.729 v1(58.806,21.692)
Ra4: CON1.B21 IC1.31 IC2.31 IC3.31 IC4.31 | length 93.8
  Top_Power w0.254: v1(15.932,22.085) v1(15.932,22.085) 16.761,22.912 IC1.31@16.761,23.403 ; v1(58.352,22.123) 59.122,22.893 IC2.31@59.122,23.447
  Inner 1 w0.254: v1(15.932,22.085) 15.886,22.039 15.886,21.454 15.759,21.327 15.759,11.854 15.784,11.829 15.784,11.655 v1(15.831,11.608) 15.831,10.704 21.226,5.309 23.098,5.309 24.546,3.86 24.546,3.859 25.994,2.411 29.57,2.411 29.955,2.796 29.955,3.381 v1(29.974,3.4) ; v1(58.352,22.123) 58.315,22.086 58.315,11.518 58.402,11.431 58.402,11.198 v1(58.449,11.151)
  Inner 4 w0.254: v1(15.932,22.085) 15.951,22.067 15.951,21.539 16.624,20.866 18.72,20.866 18.948,21.094 18.948,21.098 20.571,22.72 57.755,22.72 v1(58.352,22.123)
  Bottom_Ground w0.254: v1(15.831,11.608) 15.898,11.608 16.041,11.464 16.053,11.464 16.485,11.033 IC3.31@16.485,10.033 ; CON1.B21@29.709,1.355 29.974,1.62 v1(29.974,3.4) ; v1(58.449,11.151) 58.462,11.151 58.725,10.888 IC4.31@58.725,9.982
Ra5: CON1.B22 IC1.30 IC2.30 IC3.30 IC4.30 | length 91.4
  Top_Power w0.254: v1(16.956,22.336) 16.971,22.336 17.618,22.983 IC1.30@17.618,23.422 ; v1(59.334,22.191) 59.381,22.238 59.601,22.238 59.876,22.512 59.876,23.412 IC2.30@59.903,23.44
  Inner 1 w0.254: v1(16.956,22.336) 16.975,22.316 16.975,21.581 16.943,21.549 16.943,16.994 16.967,16.97 16.967,11.922 16.908,11.862 16.908,11.675 16.891,11.659 16.891,11.31 16.904,11.296 16.904,10.672 21.531,6.045 23.572,6.045 25.4,4.216 26.102,4.216 26.187,4.132 30.612,4.132 v1(31.244,3.5) ; v1(59.334,22.191) 59.297,22.154 59.297,16.654 59.318,16.634 59.318,11.481 59.385,11.413 59.385,11.068 v1(59.432,11.021)
  Inner 4 w0.254: v1(16.956,22.336) 16.966,22.336 18.087,23.457 24.371,23.457 24.409,23.495 58.196,23.495 59.211,22.479 59.211,22.38 59.334,22.257 v1(59.334,22.191)
  Bottom_Ground w0.254: v1(16.898,11.303) 16.853,11.258 16.853,10.767 17.272,10.348 IC3.30@17.272,10.033 ; CON1.B22@30.979,1.304 31.244,1.569 v1@31.244,3.34 ; v1(59.432,11.021) 59.474,10.98 59.474,9.994 IC4.30@59.461,9.982
Ra6: CON1.B23 IC1.29 IC2.29 IC3.29 IC4.29 | length 91.8
  Top_Power w0.254: v1(17.926,22.022) 17.973,22.069 17.973,22.484 18.38,22.892 IC1.29@18.38,23.422 ; v1(60.317,22.073) 60.727,22.483 IC2.29@60.727,23.44
  Inner 1 w0.254: v1(17.926,22.022) 17.926,21.2 17.883,21.158 17.883,11.869 17.89,11.862 17.89,11.237 v1(17.88,11.227) 17.927,11.18 17.927,10.691 21.836,6.782 23.877,6.782 25.686,4.972 26.388,4.972 26.492,4.868 26.899,4.868 27.212,5.182 27.236,5.182 27.254,5.199 27.661,5.199 27.678,5.182 27.835,5.182 28.47,4.547 31.493,4.547 v1(32.539,3.5) ; v1(60.317,22.073) 60.28,22.036 60.28,16.773 60.373,16.68 60.373,11.428 v1(60.372,11.426)
  Inner 2 w0.254: v1(17.926,22.022) 17.973,21.975 18.553,21.975 18.73,21.797 19.245,21.797 20.929,23.482 59.259,23.482 59.309,23.431 59.318,23.431 60.27,22.48 60.27,22.12 v1(60.317,22.073)
  Bottom_Ground w0.254: v1(17.88,11.227) 17.88,11.16 18.052,10.988 18.052,10.142 IC3.29@18.059,10.135 ; CON1.B23@32.274,1.38 32.539,1.645 v1@32.539,3.416 ; IC4.29@60.274,10.033 60.372,10.13 60.345,10.157 60.345,11.4 v1(60.372,11.426)
Ra7: CON1.B33 IC1.28 IC2.28 IC3.28 IC4.28 | length 96.5
  Top_Power w0.254: v1(18.934,22.289) 18.981,22.336 18.981,22.65 19.161,22.83 IC1.28@19.161,23.408 ; v1(61.3,22.149) 61.3,22.215 61.476,22.391 IC2.28@61.476,23.464
  Inner 1 w0.254: v1(18.863,11.303) 18.866,11.306 18.866,16.74 18.934,16.808 v1(18.934,22.289) ; v1(45.232,2.921) 45.237,2.921 45.695,2.464 51.004,2.464 51.436,2.032 58.776,2.032 60.575,3.832 v1(60.575,4.716) ; v1(61.283,10.956) 61.283,11.022 61.459,11.199 61.459,11.803 61.263,12 61.263,22.112 v1(61.3,22.149)
  Inner 2 w0.254: v1(18.934,22.289) 18.981,22.336 19.262,22.336 20.777,23.85 59.598,23.85 v1(61.3,22.149) ; v1(60.575,4.716) 60.575,4.737 61.283,5.445 v1(61.283,10.956)
  Bottom_Ground w0.254: v1(18.863,11.303) 18.875,11.291 18.875,10.056 IC3.28@18.898,10.033 ; CON1.B33@44.923,1.33 45.232,1.638 v1(45.232,2.921) ; IC4.28@61.087,10.084 61.172,10.168 61.172,10.778 61.283,10.889 v1(61.283,10.956)
Ra8: CON1.B34 IC1.27 IC2.27 IC3.27 IC4.27 | length 108.4
  Top_Power w0.254: IC1.27@20.005,23.317 20.005,22.147 20.053,22.099 v1(20.053,21.389) ; IC1.27@20.018,23.317 20.042,23.341 20.042,25.177 v1(20.066,25.201) ; IC2.27@62.389,23.355 62.389,22.511 62.65,22.249 v1(62.65,22.239)
  Inner 1 w0.254: v1(20.053,21.389) 20.053,12.27 20.176,12.147 20.176,11.6 v1(20.223,11.553) ; v1(62.469,10.994) 62.442,11.021 62.442,20.261 62.298,20.405 62.298,21.844 62.65,22.197 v1(62.65,22.239)
  Inner 4 w0.254: v1(20.223,11.553) 20.264,11.553 21.869,9.947 21.869,7.366 25.133,4.102 25.133,3.272 26.362,2.043 45.26,2.043 46.446,3.229 v1(46.446,3.244)
  Inner 2 w0.254: v1(20.066,25.201) 20.103,25.201 20.531,25.629 31.877,25.629 32.537,24.968 60.217,24.968 62.603,22.581 62.603,22.286 v1(62.65,22.239)
  Bottom_Ground w0.254: IC3.27@19.687,10.061 19.687,11.079 20.161,11.553 v1(20.223,11.553) ; CON1.B34@46.244,1.38 46.446,1.582 v1(46.446,3.244) ; IC4.27@61.925,10.008 61.925,10.396 62.469,10.94 v1(62.469,10.994)
Ra9: CON1.B24 | length 0.4
  Bottom_Ground w0.254: CON1.B24@33.544,1.38 CON1.B24@33.809,1.645
RAM_VCC: C1.1 C2.1 C3.1 C4.1 C5.1 C6.1 C7.1 C8.1 C9.1 C10.1 C11.1 C12.1 C13.1 C14.1 C15.1 C16.1 C21.1 C22.1 C23.1 C24.1 IC1.1 IC1.8 IC1.18 IC1.32 IC1.47 IC1.57 IC2.1 IC2.8 IC2.18 IC2.32 IC2.47 IC2.57 IC3.1 IC3.8 IC3.18 IC3.32 IC3.47 IC3.57 IC4.1 IC4.8 IC4.18 IC4.32 IC4.47 IC4.57 L1.2 L2.2 L3.2 L4.2 | length 68
  Top_Power w0.5: C4.1@27.213,25.933 27.215,25.931 27.215,23.32 IC1.18@27.218,23.317 ; IC1.1@40.818,23.317 40.822,23.322 40.822,25.929 C3.1@40.827,25.933 ; C8.1@58.312,25.679 58.263,25.63 58.263,23.75 58.332,23.681 IC2.32@58.332,23.317 ; C7.1@69.453,25.756 69.453,25.331 69.532,25.251 IC2.18@69.532,23.317
  Top_Power w1: L1.2@5.69,11.254 L1.2@5.723,11.287 ; C21.1@5.723,17.447 C21.1@5.756,17.48
  Top_Power w1.2: L1.2@5.723,11.287 C21.1@5.723,17.447 ; C22.1@92.951,17.962 92.964,17.95 92.964,13.665 v2(92.939,13.64) 92.939,11.912 L2.2@92.976,11.912
  Bottom_Ground w0.4: IC4.18@69.113,10.084 69.144,10.114 69.144,10.697 69.342,10.895 v1(69.342,10.922)
  Bottom_Ground w0.5: v1(14.834,10.389) 14.88,10.342 15.664,10.342 15.687,10.319 IC3.32@15.687,9.982 ; v1(26.365,26.848) 26.374,26.848 26.888,26.334 IC3.47@26.887,23.322 IC3.47@26.887,23.322 ; C10.1@26.965,7.569 26.965,7.994 26.887,8.072 IC3.18@26.887,9.982 26.897,9.992 26.897,10.975 v1(27.016,11.094) ; v1(34.061,25.781) 34.856,25.781 34.897,25.822 34.897,25.898 34.897,23.332 IC3.57@34.887,23.322 ; IC3.8@34.897,9.992 34.897,10.689 35.029,10.821 35.029,10.977 v1(35.045,10.994) ; IC3.1@40.487,9.982 40.512,9.957 40.512,9.124 40.67,8.967 40.67,8.788 ; C9.1@40.529,7.315 40.589,7.375 40.589,8.377 40.67,8.458 40.67,8.788 ; v1(41.072,8.788) 40.67,8.788 ; v1(57.353,8.255) 57.861,8.255 57.953,8.347 ; IC4.32@57.915,9.982 57.915,9.619 57.953,9.58 C14.1@57.953,7.036 ; v1(68.631,26.797) 68.631,26.679 69.069,26.241 69.069,25.816 C15.1@69.129,25.756 ; IC4.47@69.115,23.322 69.125,23.332 69.125,24.312 69.212,24.4 69.212,25.248 69.17,25.29 C15.1@69.17,25.746 ; v1(76.352,25.908) 77.07,25.908 77.07,25.892 C16.1@77.13,25.832 ; IC4.8@77.115,9.982 77.115,9.619 77.146,9.587 77.146,8.603 77.14,8.596 77.14,7.528 C13.1@77.08,7.468 78.257,7.468 v1(78.359,7.366) ; IC4.57@77.115,23.322 77.115,23.686 77.17,23.741 77.17,25.761 C16.1@77.115,25.816 ; IC4.1@82.715,9.982 82.715,10.303 82.74,10.328 v1(83.788,10.328)
  Bottom_Ground w1: L3.2@5.74,11.28 L3.2@5.748,11.287 ; C23.1@5.748,17.472 C23.1@5.756,17.48
  Bottom_Ground w1.2: L3.2@5.748,11.287 C23.1@5.748,17.472 ; v2(92.939,13.64) 92.939,11.915 L4.2@93.04,11.915 ; v2@92.964,13.665 C24.1@92.964,17.922
  other v2: 5.694,13.06 5.694,14.66 92.964,15.011
Rd0: CON1.B7 IC1.5 IC3.5 | length 50.2
  Top_Power w0.254: v1(36.882,21.109) 36.882,21.922 37.563,22.602 37.563,23.326 IC1.5@37.608,23.371
  Inner 1 w0.254: v1(12.398,2.997) 12.445,2.95 12.445,2.764 14.307,0.902 34.087,0.902 36.139,2.954 36.139,4.224 36.817,4.902 36.817,7.912 37.583,8.678 37.583,8.954 37.585,8.955 37.585,9.766 37.16,10.191 37.16,20.764 36.882,21.042 v1(36.882,21.109)
  Bottom_Ground w0.254: CON1.B7@11.903,1.203 12.343,1.642 12.343,2.876 12.398,2.931 v1(12.398,2.997) ; v1(37.16,11.068) 37.16,11.001 37.231,10.931 37.231,10.064 IC3.5@37.236,10.058
Rd1: CON1.B9 IC1.7 IC3.7 | length 45.5
  Top_Power w0.254: v1(35.408,21.753) 35.455,21.8 35.455,22.043 35.988,22.577 35.988,23.377 IC1.7@36.008,23.397
  Inner 1 w0.254: v1(14.812,3.074) 16.247,1.638 33.566,1.638 34.788,2.86 34.788,3.978 35.582,4.772 v1(35.582,11.293) ; v1(35.408,21.753) 35.366,21.712 35.366,20.651 35.582,20.435 35.582,11.311 v1@35.573,11.302
  Bottom_Ground w0.254: CON1.B9@14.418,1.279 14.812,1.673 v1(14.812,3.074) ; v1(35.582,11.293) 35.582,11.226 35.687,11.121 35.687,10.11 IC3.7@35.662,10.084
Rd2: CON1.B11 IC1.10 IC3.10 | length 34.9
  Top_Power w0.254: v1(33.068,22.187) 33.116,22.235 33.116,22.459 33.524,22.868 IC1.10@33.524,23.351
  Inner 1 w0.254: v1(33.068,22.187) 33.068,21.551 33.19,21.429 33.19,11.356 v1(33.147,11.313)
  Inner 2 w0.254: v1(17.526,3.505) 22.657,8.636 24.765,8.636 25.485,9.356 27.499,9.356 28.506,10.363 32.197,10.363 v1(33.147,11.313)
  Bottom_Ground w0.254: CON1.B11@17.034,1.279 17.423,1.668 17.423,3.336 17.526,3.439 v1(17.526,3.505) ; v1(33.147,11.313) 33.194,11.266 33.194,10.968 33.287,10.874 33.287,10.096 IC3.10@33.299,10.084
Rd3: CON1.B13 IC1.12 IC3.12 | length 42
  Top_Power w0.254: v1(31.071,22.152) 31.137,22.152 32.071,23.086 IC1.12@32.071,23.397
  Inner 1 w0.254: v1(19.749,3.583) 19.749,3.516 20.092,3.174 20.092,2.762 20.847,2.007 33.414,2.007 34.42,3.013 34.42,4.62 31.995,7.044 31.995,10.829 31.543,11.282 31.543,11.485 v1@31.498,11.529 ; v1(31.071,22.152) 31.118,22.105 31.118,21.745 31.132,21.731 31.132,21.442 31.259,21.315 31.259,11.76 31.48,11.539 31.48,11.529 v1(31.48,11.472)
  Bottom_Ground w0.254: CON1.B13@19.6,1.406 19.749,1.555 v1(19.749,3.583) ; v1(31.48,11.472) 31.48,11.445 31.687,11.237 31.687,10.097 IC3.12@31.648,10.058
Rd4: CON1.B25 IC1.15 IC3.15 | length 26.8
  Top_Power w0.254: IC1.15@29.618,23.317 29.618,22.966 29.994,22.589 29.998,22.589 30.58,22.007 30.58,21.588 v1(30.627,21.541)
  Inner 1 w0.254: v1(30.627,21.541) 30.627,11.78 30.311,11.464 30.311,11.43 29.312,10.431 v1(29.312,8.9) 29.359,8.853 29.359,8.375 32.994,4.74 32.994,4.261 v1(33.558,3.697)
  Bottom_Ground w0.254: v1@29.312,8.893 IC3.15@29.312,10.061 ; v1(33.558,3.697) 33.578,3.677 34.118,3.677 34.94,2.856 34.94,1.531 CON1.B25@34.763,1.355
Rd5: CON1.B27 IC1.17 IC3.17 | length 32.9
  Top_Power w0.254: v1(27.195,22.033) 27.195,22.088 28.007,22.9 IC1.17@28.007,23.473
  Inner 1 w0.254: v1(27.195,22.033) 27.195,17.062 27.432,16.824 27.432,11.373 27.507,11.298 27.507,11.274 27.661,11.121 v1(27.661,8.738)
  Inner 2 w0.254: v1(27.661,8.738) 28.314,9.391 33.592,9.391 34.578,8.405 34.578,6.917 v1(37.346,4.149)
  Bottom_Ground w0.254: v1(27.661,8.738) 27.674,8.751 27.674,10.173 IC3.17@27.687,10.187 ; CON1.B27@37.303,1.33 37.73,1.756 37.73,3.699 37.346,4.082 v1(37.346,4.149)
Rd6: CON1.B30 IC1.20 IC3.20 | length 36.7
  Top_Power w0.254: v1(25.02,22.028) 25.067,22.075 25.067,22.417 25.521,22.871 IC1.20@25.521,23.392
  Inner 1 w0.254: v1(25.02,22.028) 24.985,21.993 24.985,16.992 25.248,16.73 25.248,9.449 25.427,9.269 25.665,9.269 26.07,8.865 v1(26.137,8.865)
  Inner 4 w0.254: v1(26.137,8.865) 28.155,6.846 36.308,6.846 38.864,4.291 40.008,4.291 40.768,3.532 41.274,3.532 v1(41.322,3.485)
  Bottom_Ground w0.254: IC3.20@25.293,10.153 25.293,9.667 26.096,8.865 v1(26.137,8.865) ; CON1.B30@41.113,1.355 41.322,1.563 v1(41.322,3.485)
Rd7: CON1.B31 IC1.22 IC3.22 | length 41.6
  Top_Power w0.254: v1(23.345,22.054) 23.392,22.101 23.392,22.342 23.921,22.871 23.921,23.242 IC1.22@23.989,23.31
  Inner 1 w0.254: v1(23.345,22.054) 23.337,22.046 23.337,21.367 23.266,21.296 23.266,11.852 23.47,11.649 v1(23.47,11.582)
  Inner 4 w0.254: v1(23.47,11.582) 24.003,11.049 24.003,7.137 26.247,4.894 26.247,3.116 26.951,2.411 41.099,2.411 v1(41.834,3.146)
  Bottom_Ground w0.254: v1(23.47,11.582) 23.47,11.516 23.707,11.278 23.707,10.093 IC3.22@23.673,10.058 ; v1(41.834,3.146) 41.834,3.079 42.007,2.906 42.007,1.655 CON1.B31@42.383,1.279
Rd8: CON1.B50 IC1.43 IC3.43 | length 69.8
  Top_Power w0.254: IC1.43@24.018,9.977 24.003,9.991 24.003,11.042 24.005,11.044 24.005,11.696 24.257,11.948 v1(24.257,12.014)
  Inner 1 w0.254: v1(23.829,21.675) 23.81,21.657 23.81,12.461 v1(24.257,12.014)
  Inner 4 w0.254: v1(24.257,12.014) 24.897,12.014 25.315,11.596 25.315,10.898 25.825,10.389 25.979,10.235 29.119,10.235 31.246,12.362 54.453,12.362 56.833,9.982 65.423,9.982 68.013,7.393 68.013,7.366 68.368,7.01 69.291,7.01 71.483,4.819 v1(71.483,3.5)
  Bottom_Ground w0.254: IC3.43@23.687,23.322 23.744,23.266 23.744,22.35 23.836,22.257 23.836,21.683 v1(23.829,21.675) ; v1(71.483,3.5) 71.483,3.445 71.818,3.109 71.818,1.605 CON1.B50@71.593,1.38
Rd9: CON1.B52 IC1.45 IC3.45 | length 69.6
  Top_Power w0.254: IC1.45@25.618,9.977 25.561,10.034 25.561,10.676 25.518,10.718 25.518,11.486 25.898,11.866 26.152,11.866 v1(26.199,11.913)
  Inner 1 w0.254: v1(25.486,21.628) 26.162,20.953 26.162,11.95 v1(26.199,11.913)
  Inner 4 w0.254: v1(26.199,11.913) 26.199,11.846 26.525,11.52 26.525,10.891 26.593,10.822 26.593,10.799 26.749,10.643 26.773,10.643 26.812,10.603 28.967,10.603 31.094,12.73 54.606,12.73 56.922,10.414 66.523,10.414 71.009,5.928 v1(73.685,3.251)
  Bottom_Ground w0.254: IC3.45@25.287,23.322 25.287,22.456 25.586,22.157 25.586,21.795 25.486,21.695 v1(25.486,21.628) ; v1(73.685,3.251) 73.685,3.185 73.749,3.121 73.749,1.832 CON1.B52@74.167,1.414
Rd10: CON1.B54 IC1.48 IC3.48 | length 68.9
  Top_Power w0.254: IC1.48@28.018,9.977 28.053,10.013 28.053,10.711 28.414,11.071 28.414,11.405 28.424,11.415 28.424,11.915 v1(28.414,11.926)
  Inner 1 w0.254: v1(27.699,21.682) 28.414,20.968 v1(28.414,11.926)
  Inner 4 w0.254: v1(28.414,11.926) 28.461,11.879 28.877,11.879 28.93,11.826 29.668,11.826 30.941,13.098 59.09,13.098 60.123,12.065 66.443,12.065 67.191,11.317 67.191,10.914 68.809,9.296 69.215,9.296 69.583,8.928 69.583,7.988 73.592,3.979 75.097,3.979 75.486,3.59 75.489,3.59 75.894,3.185 v1(75.894,3.182)
  Bottom_Ground w0.254: IC3.48@27.687,23.322 27.687,21.694 v1(27.699,21.682) ; v1(75.894,3.182) 75.894,3.115 76.289,2.72 76.289,1.816 CON1.B54@76.724,1.38
Rd11: CON1.B56 IC1.50 IC3.50 | length 70.7
  Top_Power w0.254: v1(29.134,12.317) 29.618,11.833 IC1.50@29.618,9.977
  Inner 1 w0.254: v1(28.88,21.133) 28.88,21.066 29.134,20.812 v1(29.134,12.317)
  Inner 4 w0.254: v1(29.134,12.317) 30.284,13.467 59.242,13.467 60.276,12.433 68.543,12.433 72.322,8.655 72.322,8.271 73.605,6.987 75.487,6.987 78.664,3.81 78.664,2.915 v1(78.675,2.904)
  Bottom_Ground w0.254: v1(28.88,21.133) 28.88,22.098 29.287,22.506 IC3.50@29.287,23.322 ; v1(78.675,2.904) 78.675,2.837 78.829,2.683 78.829,1.79 CON1.B56@79.213,1.406
Rd12: CON1.B58 IC1.53 IC3.53 | length 72.4
  Top_Power w0.254: v1(31.979,11.87) 31.998,11.851 31.998,9.997 IC1.53@32.018,9.977
  Inner 1 w0.254: v1(31.623,21.644) 31.979,21.289 v1(31.979,11.87)
  Inner 2 w0.254: v1(31.979,11.87) 32.681,12.573 44.158,12.573 51.048,5.684 51.048,2.8 52.247,1.6 80.57,1.6 81.994,3.024 v1(82,3.024)
  Bottom_Ground w0.254: v1(31.623,21.644) 31.623,21.711 31.562,21.772 31.562,22.532 31.631,22.6 31.631,23.266 IC3.53@31.687,23.322 ; CON1.B58@81.779,1.406 82,1.627 v1(82,3.024)
Rd13: CON1.B63 IC1.55 IC3.55 | length 77.7
  Top_Power w0.254: IC1.55@33.618,9.977 33.645,10.005 33.645,10.983 33.737,11.075 v1(33.737,11.142)
  Inner 1 w0.254: v1(33.682,22.157) 33.682,22.091 33.737,22.036 v1(33.737,11.142)
  Inner 2 w0.254: v1(33.737,11.142) 33.737,11.18 34.762,12.205 43.23,12.205 44.006,12.205 50.679,5.531 50.679,2.647 52.095,1.232 87.185,1.232 88.392,2.438 v1(88.392,3)
  Bottom_Ground w0.254: IC3.55@33.287,23.322 33.287,22.892 33.635,22.545 33.635,22.205 v1(33.682,22.157) ; CON1.B63@88.103,1.431 88.392,1.72 v1@88.392,2.997
Rd14: CON1.B65 IC1.58 IC3.58 | length 77.6
  Top_Power w0.254: IC1.58@36.018,9.977 36.018,10.922 36.27,11.175 v1(36.27,11.228)
  Inner 1 w0.254: v1(35.858,21.331) 35.858,21.317 36.297,20.878 36.297,11.254 v1(36.27,11.228)
  Inner 2 w0.254: v1(36.27,11.228) 36.315,11.228 36.924,11.836 43.853,11.836 50.311,5.379 50.311,2.495 51.942,0.864 87.427,0.864 88.986,2.423 90.44,2.423 90.983,2.966 v1@90.983,3.023
  Bottom_Ground w0.254: IC3.58@35.687,23.322 35.687,22.316 35.899,22.105 35.899,21.373 v1(35.858,21.331) ; CON1.B65@90.669,1.431 90.983,1.745 v1@90.983,3.023
  other v1: 90.983,3
Rd15: CON1.B67 IC1.60 IC3.60 | length 78.6
  Top_Power w0.254: IC1.60@37.618,9.977 37.674,10.034 37.674,10.887 37.795,11.008 v1(37.795,11.074)
  Inner 1 w0.254: v1(37.583,21.797) 37.583,21.731 37.855,21.459 37.855,11.2 37.795,11.141 v1(37.795,11.074)
  Inner 2 w0.254: v1(37.795,11.074) 38.184,11.463 40.822,11.463 ; 40.919,11.468 43.701,11.468 49.943,5.226 49.943,2.342 51.79,0.495 87.82,0.495 89.357,2.032 90.653,2.032 91.132,2.512 93.094,2.512 93.379,2.796 93.379,2.812 93.523,2.956 v1@93.523,3.023
  Bottom_Ground w0.254: IC3.60@37.287,23.335 37.287,22.16 37.583,21.864 v1(37.583,21.797) ; CON1.B67@93.207,1.393 93.523,1.709 v1@93.523,3.023
  other v1: 93.523,3
Rd16: CON1.B8 IC2.5 IC4.5 | length 89.4
  Top_Power w0.254: v1(79.516,21.38) 79.516,21.447 79.873,21.804 79.873,22.215 79.914,22.256 IC2.5@79.914,23.411
  Inner 1 w0.254: v1(79.401,10.939) 79.448,10.986 79.448,11.34 79.516,11.409 v1(79.516,21.38)
  Inner 3 w0.254: v1(14.565,3.694) 14.612,3.647 14.934,3.647 17.056,1.524 20.8,1.524 21.879,0.445 46.94,0.445 48.502,2.007 50.85,2.007 51.993,0.864 69.98,0.864 71.974,2.858 71.974,4.486 75.006,7.518 76.166,7.518 79.354,10.707 79.354,10.892 v1(79.401,10.939)
  Bottom_Ground w0.254: CON1.B8@13.148,1.38 13.555,1.787 13.555,3.268 13.994,3.707 14.552,3.707 v1(14.565,3.694) ; v1(79.401,10.939) 79.401,10.872 79.458,10.815 79.458,10.077 IC4.5@79.502,10.033
Rd17: CON1.B10 IC2.7 IC4.7 | length 84.6
  Top_Power w0.254: v1(77.419,22.123) 77.826,22.123 78.276,22.573 IC2.7@78.276,23.105
  Inner 1 w0.254: v1(77.419,22.123) 77.419,12.624 77.775,12.268 v1(77.775,10.964)
  Inner 3 w0.254: v1(16.281,3.2) 16.281,3.134 16.99,2.426 17.523,1.892 20.952,1.892 22.032,0.813 46.787,0.813 48.349,2.375 51.003,2.375 52.146,1.232 67.709,1.232 69.412,2.935 69.412,3.234 70.369,4.191 71.044,4.191 74.778,7.925 76.051,7.925 77.775,9.648 v1(77.775,10.964)
  Bottom_Ground w0.254: CON1.B10@15.739,1.33 16.153,1.744 16.153,3.005 16.281,3.134 v1(16.281,3.2) ; v1(77.775,10.964) 77.775,10.897 77.858,10.814 77.858,10.102 IC4.7@77.927,10.033
Rd18: CON1.B12 IC2.10 IC4.10 | length 80.4
  Top_Power w0.254: v1(75.159,22.174) 75.206,22.221 75.434,22.221 75.84,22.627 75.84,22.67 75.876,22.706 75.876,23.357 IC2.10@75.84,23.392
  Inner 1 w0.254: v1(75.159,22.174) 75.159,11.874 75.429,11.604 75.429,11.007 v1(75.463,10.973)
  Inner 3 w0.254: v1(18.11,3.226) 19.075,2.261 21.105,2.261 22.184,1.181 46.635,1.181 48.197,2.743 51.155,2.743 52.298,1.6 66.598,1.6 68.129,3.132 68.129,3.466 69.261,4.597 70.891,4.597 74.778,8.484 74.778,10.287 v1(75.463,10.973)
  Bottom_Ground w0.254: v1(18.11,3.226) 18.11,1.6 CON1.B12@18.304,1.406 ; v1(75.463,10.973) 75.489,10.947 75.489,9.982 IC4.10@75.514,9.957